# Altium PCB flarm-f4-interface.PcbDoc
Units mm, origin at the board's own origin, x right, y up, seen from the top; angles counter-clockwise.
Board outline 38 x 40 mm, 2 copper layers (Top Layer, Bottom Layer), stack 1.671 mm thick; 13 components, 16 nets, 77 pads, 17 vias.
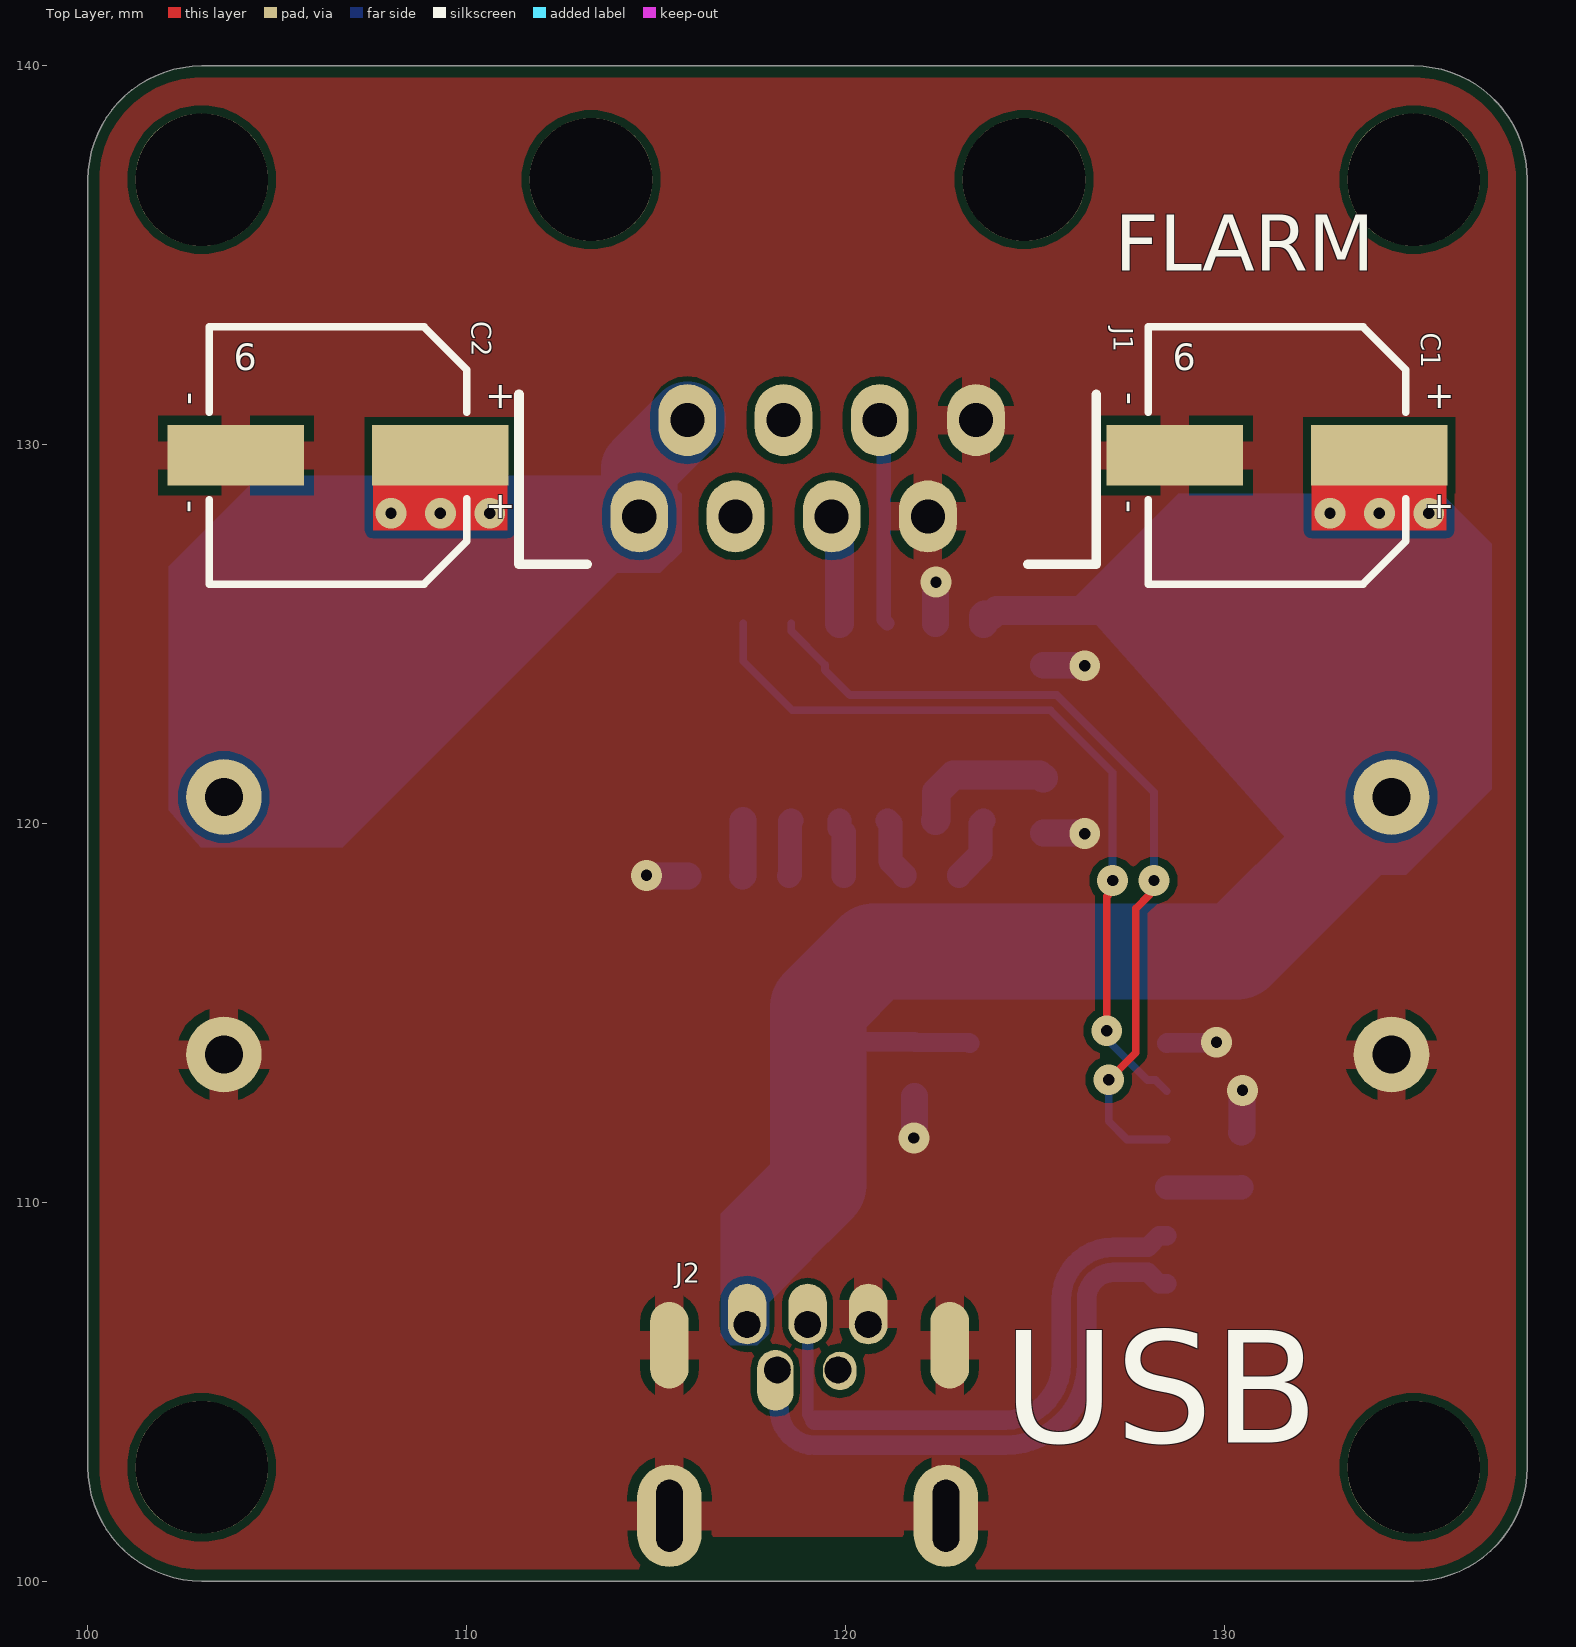
[diagram p0: Top Layer view]
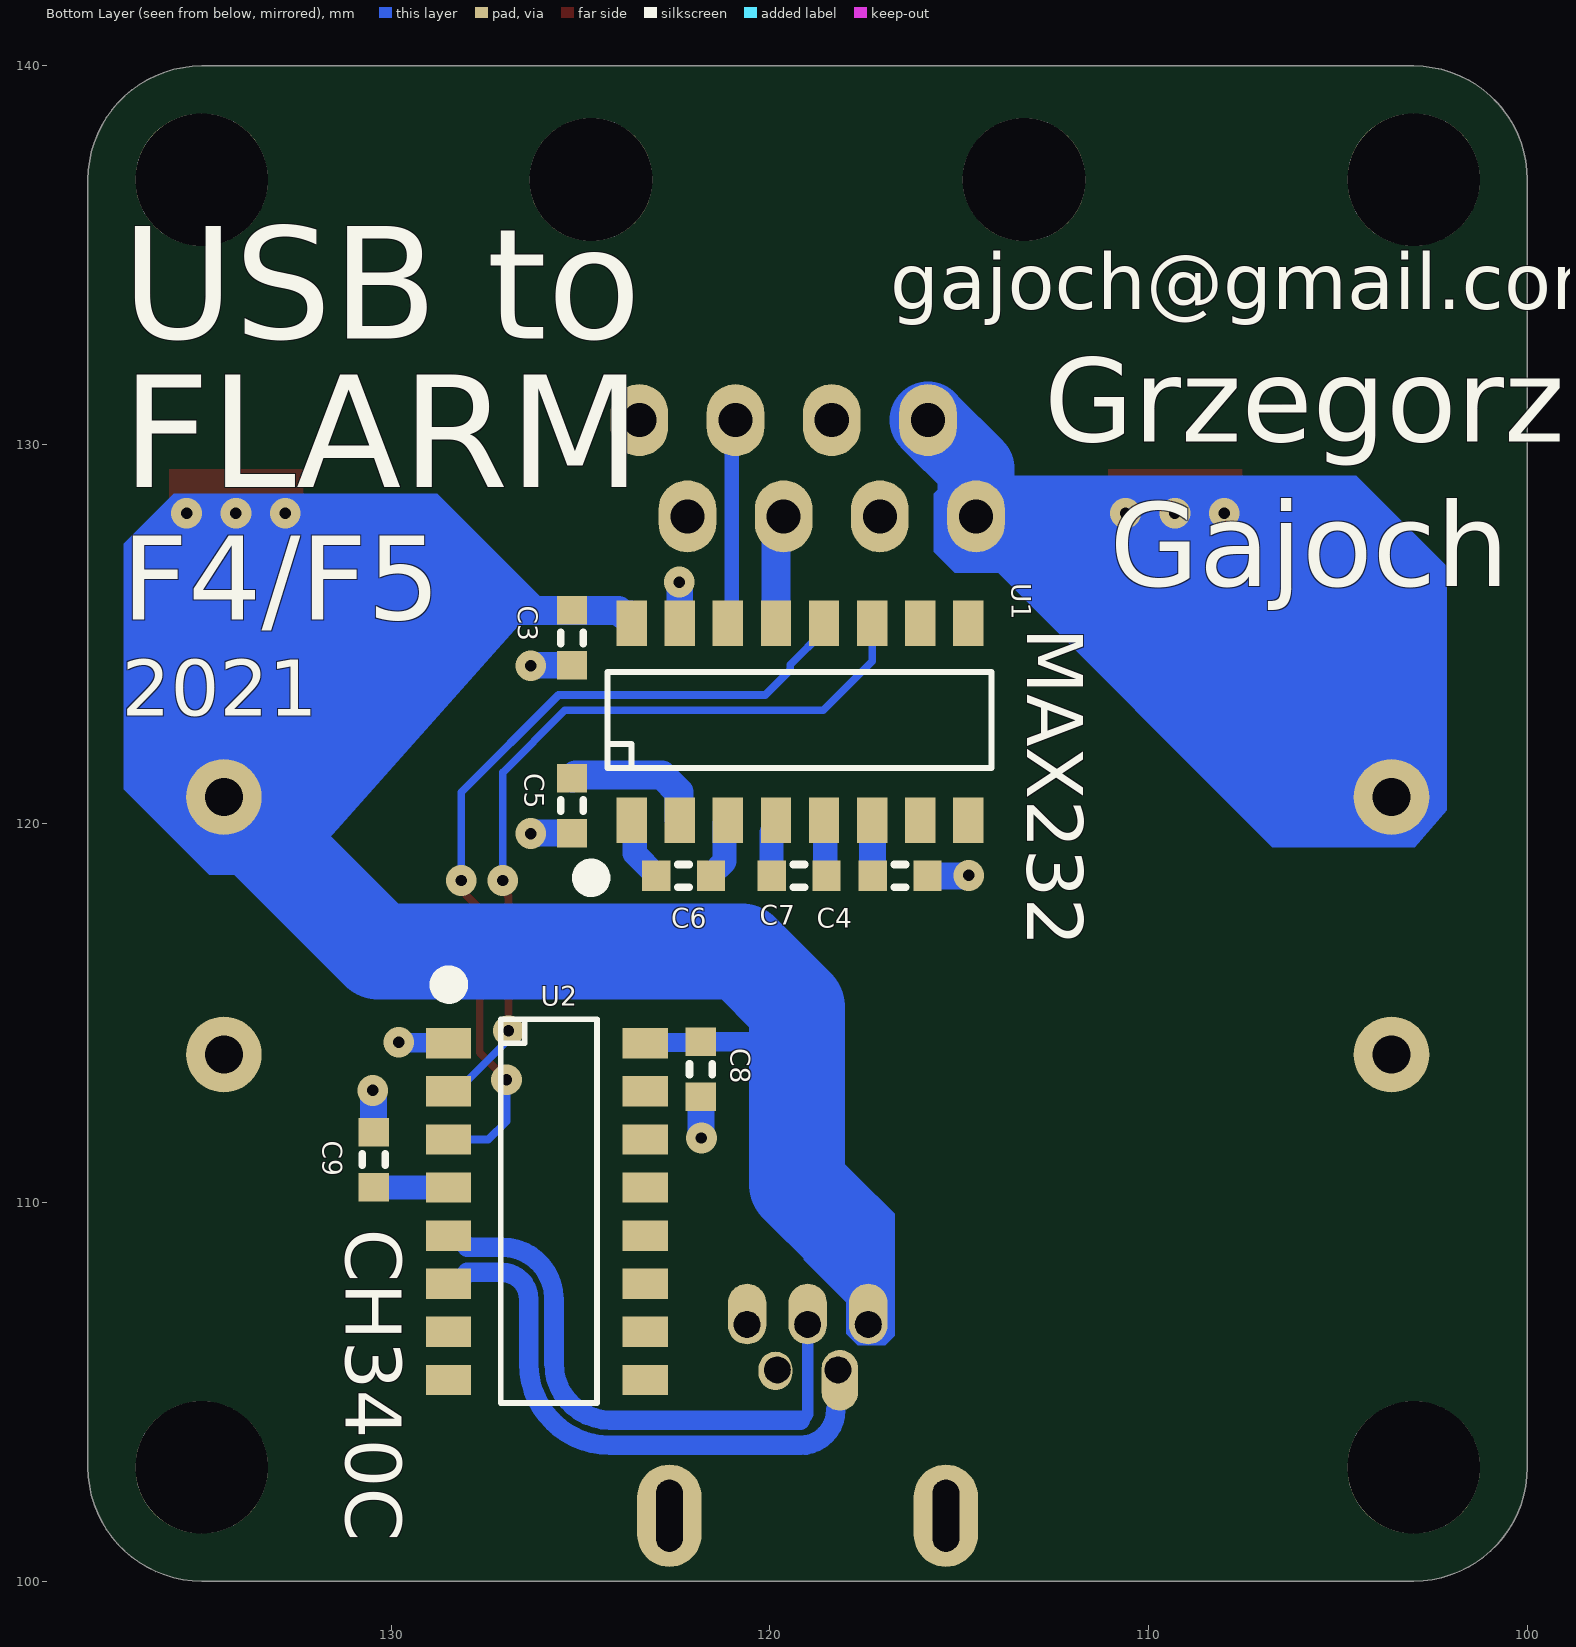
[diagram p1: Bottom Layer view, seen from below]
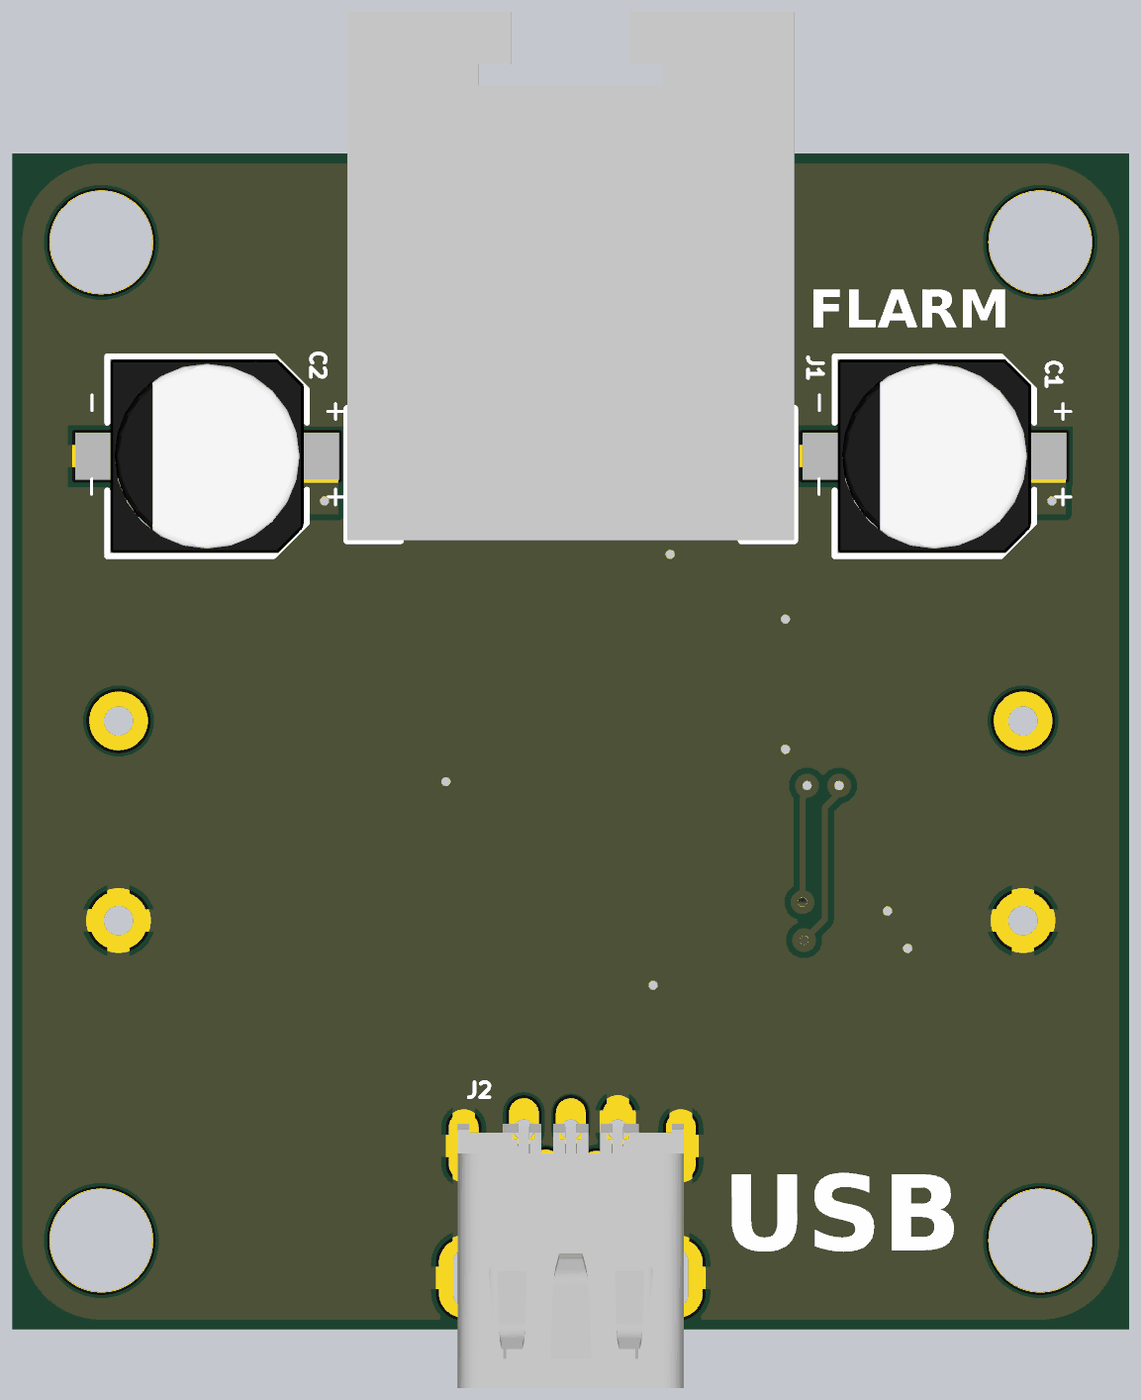
[diagram p2: 3D render of the assembled board from above, using the file's embedded part models]
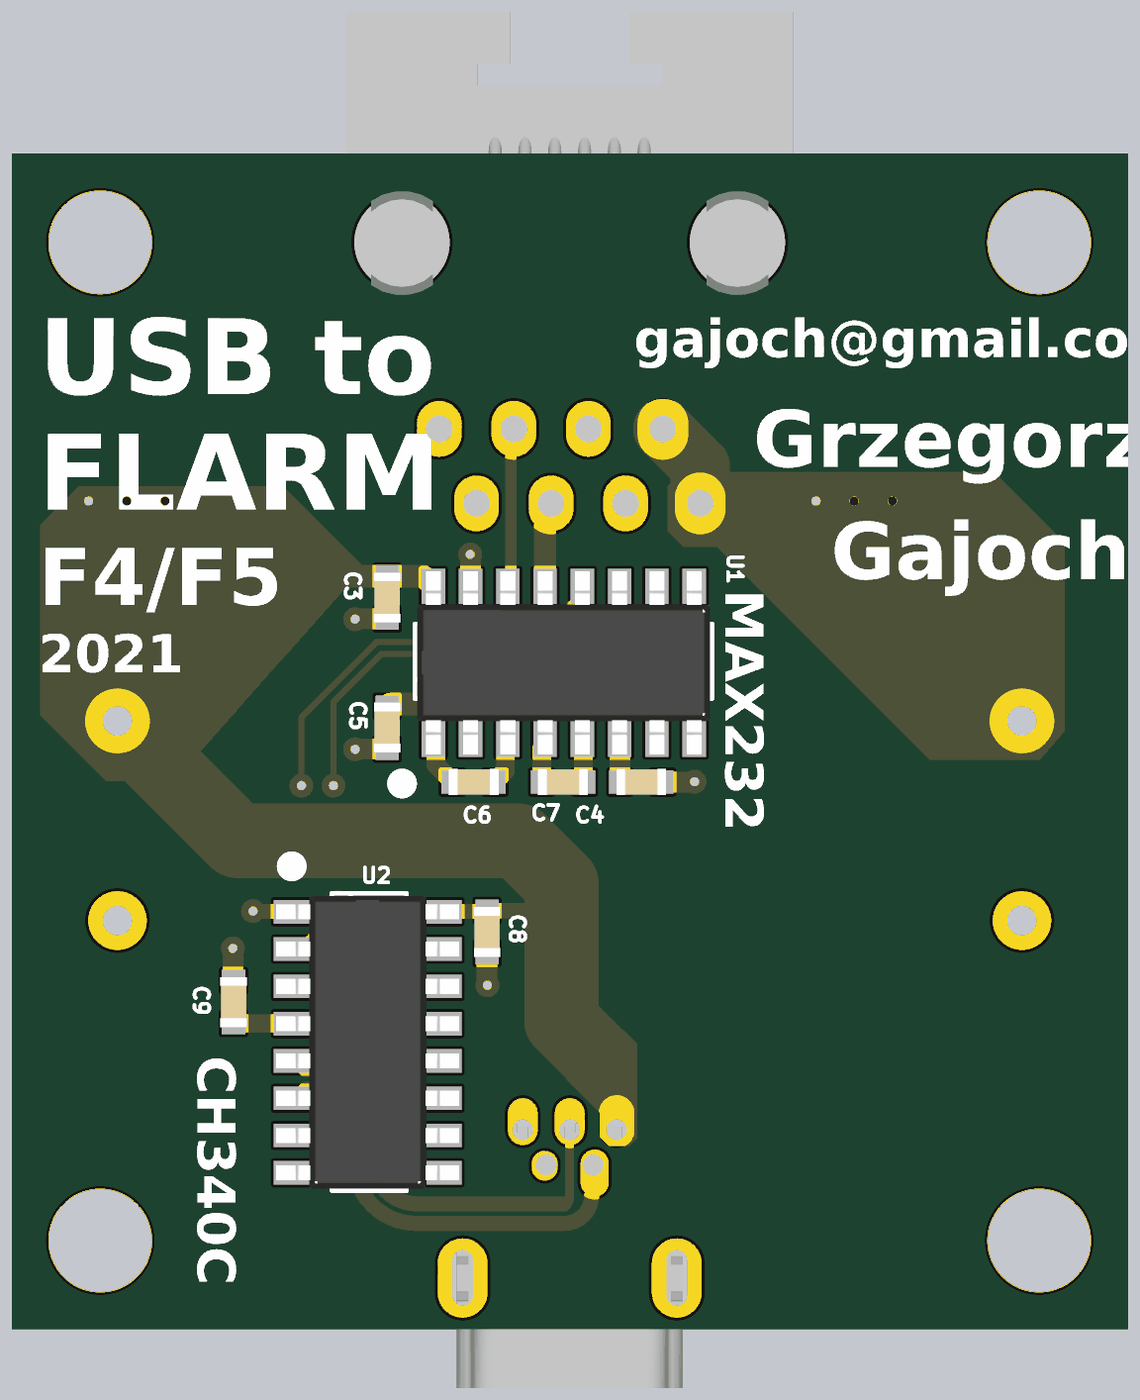
[diagram p3: 3D render of the assembled board from below, using the file's embedded part models]

## Layer stack, top to bottom
Top Solder: solder mask 0.0102, Solder Resist, Dk 3.5
Top Layer: signal copper 0.0356
Dielectric 1: dielectric 1.6, FR-4, Dk 4.8
Bottom Layer: signal copper 0.0356
Bottom Solder: solder mask 0.0102, Solder Resist, Dk 3.5

## Board outline
100,103 100,137 cw(c103,137) 103,140 135,140 cw(c135,137) 138,137 138,103 cw(c135,103) 135,100 103,100 cw(c103,103)

## Design rules (kind name [scope] priority, off if disabled: settings)
BoardOutlineClearance [All] p1: gap=0.3 ignorepadtopadclearanceinfootprint=FALSE
Clearance [InNetClass('USB')] p1: gap=0.152 ignorepadtopadclearanceinfootprint=TRUE
Clearance Clearance_1 [All] p2: gap=0.203 ignorepadtopadclearanceinfootprint=TRUE
DiffPairsRouting [All] p1: maxlimit=0.152 minlimit=0.152 mostfreqgap=0.152 toplayer_minwidth=0.305 toplayer_maxwidth=0.516 toplayer_prefwidth=0.516 bottomlayer_minwidth=0.305 bottomlayer_maxwidth=0.516 bottomlayer_prefwidth=0.516 impedanceprofiledriven=TRUE impedanceprofileid={1ADC550B-2341-4025-9417-B86FEB8244E0} impedanceprofilevalue=90.000000 maxuncoupledlength=12.7
HoleSize [All] p1: absolutevalues=TRUE maxlimit=3.54 minlimit=0.025 maxpercent=80.000 minpercent=20.000
MatchedLengths USB [InxSignalClass('USB_MatchLengthsClass')] p1: tolerance=2.54 checknetsindiffpair=FALSE checkdiffpairvsdiffpair=TRUE checkxsignals=TRUE checkothers=TRUE
MinimumSolderMaskSliver [All] p1: minsoldermaskwidth=0
PolygonConnect PolygonConnect_1 [IsVia] p1: connectstyle=Direct reliefconductorwidth=0.254 reliefentries=4 polygonreliefangle="90 Angle" airgapwidth=0.254
PolygonConnect [All] p2: connectstyle=Relief reliefconductorwidth=0.762 reliefentries=4 polygonreliefangle="90 Angle" airgapwidth=0.254
RoutingVias [All] p1: holewidth=0.3 width=0.813 viastyle="Through Hole" minholewidth=0.3 minwidth=0.813 maxholewidth=0.3 maxwidth=0.813
SilkToSilkClearance [All] p1: silktosilkclearance=0.076
SilkToSolderMaskClearance [IsPad] p1: minsilkscreentomaskgap=0.076 clearancetoexposedcopper=TRUE
SolderMaskExpansion [All] p1: expansion=0.102 istentingtop=FALSE
Width [All] p1: maxlimit=2.54 minlimit=0.152 preferedwidth=0.254 minimp=50.000000 maximp=50.000000 favimp=50.000000
25 further rules are at their usual default settings.

## Classes and differential pairs
net class USB: USB_N USB_P
differential pair USB: +USB_P -USB_N

## Components (designator, comment, footprint, x,y, rotation, side; value= is the part's Value field where it differs from the comment)
C1 "Electrolytic Capacitor" CE_D_6x5_SMD 131.394,129.718 r0 top value=220uF
C2 "Electrolytic Capacitor" CE_D_6x5_SMD 106.604,129.718 r0 top value=220uF
C3 "Ceramic X7R" C_0603_1608 125.222,124.903 r270 bottom value=1uF
C4 "Ceramic X7R" C_0603_1608 116.561,118.618 r180 bottom value=1uF
C5 "Ceramic X7R" C_0603_1608 125.222,120.472 r270 bottom value=1uF
C6 "Ceramic X7R" C_0603_1608 122.276,118.618 r180 bottom value=1uF
C7 "Ceramic X7R" C_0603_1608 119.228,118.618 r180 bottom value=1uF
C8 "Ceramic X7R" C_0603_1608 121.818,113.513 r270 bottom value=1uF
C9 "Ceramic X7R" C_0603_1608 130.454,111.125 r90 bottom value=1uF
J1 "RJ45 without magnetics" J_RJ45_54601-908WPLF 119,134 r180 top value=54601-908WPLF
J2 "USB connector" J_USB_MINIB_54819-0519_THT 119,104.4 r90 top value=54819-0519
U1 "MAX232D UART/RS-232 Converter" SOP16_SO16_SOIC16_4X10X6 119.202,122.682 r180 bottom value=MAX232D
U2 "USB to serial chip" SOP16_SO16_SOIC16_4X10X6 125.882,109.753 r270 bottom value=CH340G

## Footprints (in the part's own frame and the unit in brackets; to place one, negate y for a bottom-side part, rotate by r counter-clockwise, add the part's x,y. Pads: shape width x height; smd on the part's side, far side on the other; paste and mask are expansions set on the pad)
C_0603_1608 [mm]
  rect 0.75x0.8 smd: 1(-0.725,0) 2(0.725,0)
  silkscreen extent -0.15,-0.3 0.15,0.3, body extent -0.85,-0.45 0.85,0.45, height 0.89
CE_D_6x5_SMD [mm]
  rect 3.6x1.6 smd: 1(2.7,0) 2(-2.7,0)
  silkscreen extent -3.4,-3.4 3.4,3.4, body extent -3.3,-3.3 3.3,3.3, height 4.23
J_RJ45_54601-908WPLF [mm]
  oval 1.525x1.9 hole 0.9: 1(-4.444,3.35) 2(-3.174,5.89) 3(-1.904,3.35) 4(-0.634,5.89) 5(0.636,3.35) 6(1.906,5.89) 7(3.176,3.35) 8(4.446,5.89)
  round 3.251 hole 3.25 unplated: DNC(-5.716,-3) DNC(5.716,-3)
  silkscreen extent -7.62,2.67 7.62,7.15, body extent -7.62,-10.86 7.62,7.14, height 11.7
J_USB_MINIB_54819-0519_THT [mm]
  oval 1.6x1.016 hole 0.7 copper offset 0.275,0: 1(2.375,1.6) 3(2.375,0) 5(2.375,-1.6)
  oval 1.6x0.965 hole 0.7 copper offset -0.275,0.051: 2(1.175,0.8)
  oval 1.016x0.889 hole 0.7 copper offset -0.025,-0.051: 4(1.175,-0.8)
  oval 2.7x1.7 hole 0.7 slot 1.9 at 0 deg: MH(-2.675,3.65) MH(-2.675,-3.65)
  oval 2.286x1.016 smd paste-100: MH(1.825,3.65) MH(1.825,-3.75)
  Top Layer pour cut-out: -4.425,3.1 -3.225,3.1 -3.225,-3.1 -4.425,-3.1
  body extent -6.42,-3.85 2.57,3.85, height 3.96
SOP16_SO16_SOIC16_4X10X6 [mm]
  rect 0.8x1.2 smd: 1(-4.445,-2.6) 2(-3.175,-2.6) 3(-1.905,-2.6) 4(-0.635,-2.6) 5(0.635,-2.6) 6(1.905,-2.6) 7(3.175,-2.6) 8(4.445,-2.6) 9(4.445,2.6) 10(3.175,2.6) 11(1.905,2.6) 12(0.635,2.6) 13(-0.635,2.6) 14(-1.905,2.6) 15(-3.175,2.6) 16(-4.445,2.6)
  silkscreen extent -5.77,-4.37 5.05,1.32, body extent -4.99,-3.12 4.99,3.12, height 1.58

## Part data
C1 C2: library part CE_220uF_10V_AlPoly_6x5_20, "Polarized Capacitor", Dielectric=AlPoly, Manufacturer="Wurth Elektronik", Manufacturer Part Number=875105244013, Tolerance (%)=20, Voltage=10V, HelpURL=https://datasheet.octopart.com/875105244013-W%C3%BCrth-Elektronik-datasheet-37144758.pdf, Part Number=CE_220uF_10V_AlPoly_6x5_20, SCH_Footprint=6x5, Supplier 1=TME, Supplier 2="RS Components", Supplier 3=Farnell, Supplier 4=Mouser, Supplier 5=Digi-Key, Supplier 6=LCSC, Supplier Part Number 2=8387471, Supplier Part Number 3=2466651, Supplier Part Number 4=710-875105244013, Supplier Part Number 5=732-6413-1-ND
C3 C4 C5 C6 C7 C8 C9: library part C_1uF_25V_X7R_0603_10, "Capacitor", Dielectric=X7R, Manufacturer=Samsung, Manufacturer Part Number=CL10B105KA8NNNC, Tolerance (%)=10, Voltage=25V, HelpURL=http://www.tme.eu/pl/Document/4a42202b32dab16128fe107dd69598cc/samsung-chip-cap.pdf, Part Number=C_1uF_25V_X7R_0603_10, SCH_Footprint=0603, Supplier 1=TME, Supplier 2="RS Components", Supplier 3=Farnell, Supplier 4=Mouser, Supplier 5=Digi-Key, Supplier 6=LCSC, Supplier Part Number 1=CL10B105KA8NNNC
J1: library part J_RJ45_54601-908WPLF, Manufacturer=Amphenol, Manufacturer Part Number=54601-908WPLF, HelpURL=https://cdn.amphenol-icc.com/media/wysiwyg/files/drawing/c-bmj-0051.pdf, Part Number=J_RJ45_54601-908WPLF, SCH_Footprint=RJ45, Supplier 1=TME, Supplier 2="RS Components", Supplier 3=Farnell, Supplier 4=Mouser, Supplier 5=Digi-Key, Supplier 6=LCSC, Supplier Part Number 1=54601-908WPLF, Supplier Part Number 3=2135981, Supplier Part Number 4=649-54601-908WPLF, Supplier Part Number 5=609-5081-ND
J2: library part J_USB_MINIB_54819-0519, "USB A THT Connector", Manufacturer=Molex, Manufacturer Part Number=54819-0519, Supplier Part Number 1=MX-54819-0519, HelpURL=http://www.molex.com/pdm_docs/sd/548190519_sd.pdf, Part Number=J_USB_MINIB_54819-0519, SCH_Footprint=THT, Supplier 1=TME, Supplier 2="RS Components", Supplier 3=Farnell, Supplier 4=Mouser, Supplier 5=Digi-Key, Supplier 6=LCSC, Supplier Part Number 2=5152005P, Supplier Part Number 3=9786465, Supplier Part Number 4=538-54819-0519
U1: library part U_MAX232D, Manufacturer="Texas Instruments", Manufacturer Part Number=MAX232D, HelpURL=https://www.ti.com/lit/ds/symlink/max232.pdf, Part Number=U_MAX232D, SCH_Footprint=SOIC-16, Supplier 1=TME, Supplier 2="RS Components", Supplier 3=Farnell, Supplier 4=Mouser, Supplier 5=Digi-Key, Supplier 6=LCSC, Supplier Part Number 1=MAX232D, Supplier Part Number 2=5172908, Supplier Part Number 3=3006953, Supplier Part Number 4=595-MAX232D, Supplier Part Number 5=296-6936-5-ND
U2: library part U_CH340G, Manufacturer=WCH, Manufacturer Part Number=CH340G, HelpURL=https://www.mpja.com/download/35227cpdata.pdf, Part Number=U_CH340G, SCH_Footprint=SOP16, Supplier 1=TME, Supplier 2="RS Components", Supplier 3=Farnell, Supplier 4=Mouser, Supplier 5=Digi-Key, Supplier 6=LCSC, Supplier 7=WCH, Supplier Part Number 7=CH340G

## Free pads (board coordinates)
  round 2 hole 1: 1(103.588,120.7) 1(134.413,120.7) 2(103.588,113.9) 2(134.413,113.9)
  round 3.5 hole 3.5: 3(103,137) 4(135,137) 5(135,103) 6(103,103)

## Via types
v1: diameter 0.813, hole 0.3, Top Layer to Bottom Layer, tented both sides, 17 vias

## Nets (pads, with @x,y where several pads share a name; then routed paths per layer and width w, separated by ;. In a path a pad name is that pad's centre, name@x,y a point inside that pad or via, vN(x,y) a via of type N, cw(c..) or ccw(c..) an arc to the next point about the centre after c; other vN are vias at no path point)
+5V: C1.1 C3.1 C8.1 J2.1 pad.1@134.413,120.7 U1.16 U2.16 | length 40.7
  Bottom Layer w0.508: 119.278,115.149 120.19,114.238 C8.1 121.838,114.218 123.263,114.218 U2.16
  Bottom Layer w0.762: U1.16 123.647,125.482 123.666,125.501 123.866,125.501 123.994,125.628 C3.1 126.949,125.628 133.145,119.432
  Bottom Layer w2.54: 117.975,109.175 119.278,110.478 119.278,115.149 120.747,116.618 130.33,116.618 133.145,119.432 pad.1@134.413,120.7
  other v1: 132.791,128.194 134.094,128.194 135.397,128.194
+12V: C2.1 J1.7 J1.8 pad.1@103.588,120.7 | length 3.1
  Bottom Layer w2.032: J1.8 114.554,129.38 J1.7
  other v1: 108.001,128.194 109.304,128.194 110.607,128.194
FLARM_RX: J1.3 U1.14 | length 5.5
  Bottom Layer w0.381: J1.3 121.006,130.548 121.006,125.384 U1.14
FLARM_TX: J1.4 U1.13 | length 2.9
  Bottom Layer w0.762: J1.4 119.634,127.716 119.837,127.513 U1.13
GND: C1.2 C2.2 C3.2 C4.2 C5.2 C8.2 C9.2 J1.1 J1.2 J2.5 J2.MH pad.2 U1.15 U2.1 | length 7.8
  Bottom Layer w0.508: U2.1 128.495,114.211 129.781,114.211 v1(129.794,114.224)
  Bottom Layer w0.711: v1@114.757,118.618 C4.2 ; v1@121.818,111.709 C8.2 ; U1.15 v1@122.377,126.36 ; C5.2 v1@126.3,119.747 ; C3.2 v1@126.3,124.178 ; C9.2 130.467,111.863 130.467,112.941 v1(130.48,112.954)
  other v1: 121.806,111.697 114.745,118.631 126.313,119.734 126.313,124.166 122.39,126.373
NetC4_1: C4.1 U1.6 | length 1.5
  Bottom Layer w0.711: C4.1 117.291,118.624 117.291,120.076 U1.6
NetC5_1: C5.1 U1.2 | length 3.8
  Bottom Layer w0.762: U1.2 122.396,120.101 122.396,120.831 122.843,121.277 125.129,121.277 125.209,121.197 C5.1
NetC6_1: C6.1 U1.1 | length 1.7
  Bottom Layer w0.635: C6.1 123.001,118.643 123.565,119.207 123.565,119.999 U1.1
NetC6_2: C6.2 U1.3 | length 1.6
  Bottom Layer w0.635: U1.3 121.19,119.999 121.19,119.004 121.551,118.643 C6.2
NetC7_1: C7.1 U1.4 | length 1.5
  Bottom Layer w0.635: U1.4 119.837,119.882 119.953,119.767 C7.1
NetC7_2: C7.2 U1.5 | length 1.5
  Bottom Layer w0.635: C7.2 118.535,118.65 118.535,120.05 U1.5
NetC9_1: C9.1 U2.4 | length 2
  Bottom Layer w0.635: U2.4 128.488,110.394 130.449,110.394 C9.1
NetU1_11: U1.11 U2.2 | length 21.2
  Top Layer w0.203: v1(126.898,114.529) 126.898,118.074 126.934,118.109 126.934,118.381 v1(127.051,118.497)
  Bottom Layer w0.203: U1.11 117.297,124.282 118.593,122.987 125.409,122.987 127.051,121.345 v1(127.051,118.497) ; v1(126.898,114.529) 127.015,114.412 127.015,114.183 127.972,113.227 128.184,113.227 U2.2
NetU1_12: U1.12 U2.3 | length 22.7
  Top Layer w0.203: v1@126.949,113.068 v1(126.949,113.233) 127.66,113.944 127.66,117.754 128.026,118.12 128.026,118.381 v1(128.143,118.497)
  Bottom Layer w0.203: U1.12 118.567,125.082 119.456,124.193 119.456,124.054 120.117,123.393 125.578,123.393 128.143,120.828 v1(128.143,118.497) ; v1(126.949,113.233) 126.949,112.141 127.432,111.658 U2.3
USB_N: J2.2 U2.6 | length 14.2
  Bottom Layer w0.516: J2.2@118.254,104.521 ccw(c119.194,104.521) 119.194,103.581 124.206,103.581 ccw(c124.206,105.74) 126.365,105.74 126.365,107.438 cw(c127.076,107.438) 127.076,108.149 127.411,108.149 127.982,108.149 128.282,107.848 U2.6
USB_P: J2.3 U2.5 | length 15.4
  Bottom Layer w0.305: J2.3 119,104.444 ccw(c119.194,104.444) 119.194,104.25
  Bottom Layer w0.516: 119.194,104.25 124.206,104.25 ccw(c124.206,105.74) 125.696,105.74 125.696,107.438 cw(c127.076,107.438) 127.076,108.818 127.134,108.818 127.982,108.818 128.282,109.118 U2.5
pads on no net: J1.5 J1.6 J1.DNC J2.4 U1.7 U1.8 U1.9 U1.10 U2.7 U2.8 U2.9 U2.10 U2.11 U2.12 U2.13 U2.14 U2.15

## Polygon pours and split planes (outlines as drawn)
GND on Top Layer "GND_L01_P000" (solid, pour order 0): 100,100 100,140 138,140 138,100

## Other copper
Top Layer:
  rectangle net +12V: 107.518,127.737 111.074,129.362
  rectangle net +5V: 132.309,127.737 135.865,129.362
Bottom Layer:
  region net +12V: 102.133,120.345 102.133,126.797 104.521,129.184 115.189,129.184 115.672,128.702 115.672,127.178 115.113,126.619 113.97,126.619 106.731,119.38 102.972,119.38
  region net +5V: 126.009,125.933 128.778,128.702 135.738,128.702 137.058,127.381 137.058,120.904 134.798,118.643 132.486,118.643
  region net +5V: 116.7,106.825 116.7,106.475 116.95,106.225 117.675,106.225 117.983,106.533 117.983,106.756
  region net +5V: 116.7,106.824 116.7,109.7 117.175,110.175 118.125,110.175 118.339,110.388 119.101,109.626 119.101,108.483 117.983,107.366 117.983,106.734

## Silkscreen, mask and mechanical layers (free items; w line width, h text height)
Top Overlay:
  text "FLARM" at 127.102,134.104 h2.54
  text "USB" at 124.155,102.669 h5.08
Bottom Overlay:
  text "gajoch@gmail.com" at 116.817,133.093 h2.54
  text "USB to" at 137.109,131.828 h5.08
  text "Grzegorz" at 112.751,129.357 h3.81
  text "FLARM" at 137.109,127.902 h5.08
  text "Gajoch" at 111.028,125.536 h3.81
  text "MAX232" at 113.693,125.171 h2.54 r90
  text "F4/F5" at 137.109,124.652 h3.81
  text "2021" at 137.109,122.362 h2.54
  text "CH340C" at 131.683,109.296 h2.54 r90
Mechanical 1:
  region: 107.525,117 107.55,116.975 107.55,111.425 107.65,111.425 108.5,110.575 116.225,110.575 117.35,111.7 117.35,117.15
  lines w0.254: 100,103 ccw(c103,103) 103,100 135,100 ccw(c135,103) 138,103 138,137 ccw(c135,137) 135,140 103,140 ccw(c103,137) 100,137 100,103
  lines w0.5: 107.35,112.45 ccw(c109.35,112.45) 109.35,110.45 115.35,110.45 ccw(c115.35,112.45) 117.35,112.45 117.35,117.15 107.35,117.15 107.35,112.45
Mechanical 15:
  lines w0.254: 100.5,108.6 100.5,126 137.5,126 137.5,108.6 100.5,108.6

## Text inside footprints (layer, text, board x,y; h text height)
C1: Top Overlay "6" at 128.634,131.968 h0.7; Top Overlay "+" at 135.274,130.968 h0.7; Top Overlay "+" at 135.274,128.058 h0.7; Top Overlay "-" at 127.744,131.038 h0.7 r90; Top Overlay "-" at 127.734,128.188 h0.7 r90
C2: Top Overlay "6" at 103.844,131.968 h0.7; Top Overlay "+" at 110.484,130.968 h0.7; Top Overlay "+" at 110.484,128.058 h0.7; Top Overlay "-" at 102.954,131.038 h0.7 r90; Top Overlay "-" at 102.944,128.188 h0.7 r90